# Altium PCB PCB1.PcbDoc
Units mm, origin at the board's own origin, x right, y up, seen from the top; angles counter-clockwise.
Board outline 50 x 40 mm, 2 copper layers (Top Layer, Bottom Layer), stack 1.534 mm thick; 29 components, 28 nets, 112 pads, 28 vias.
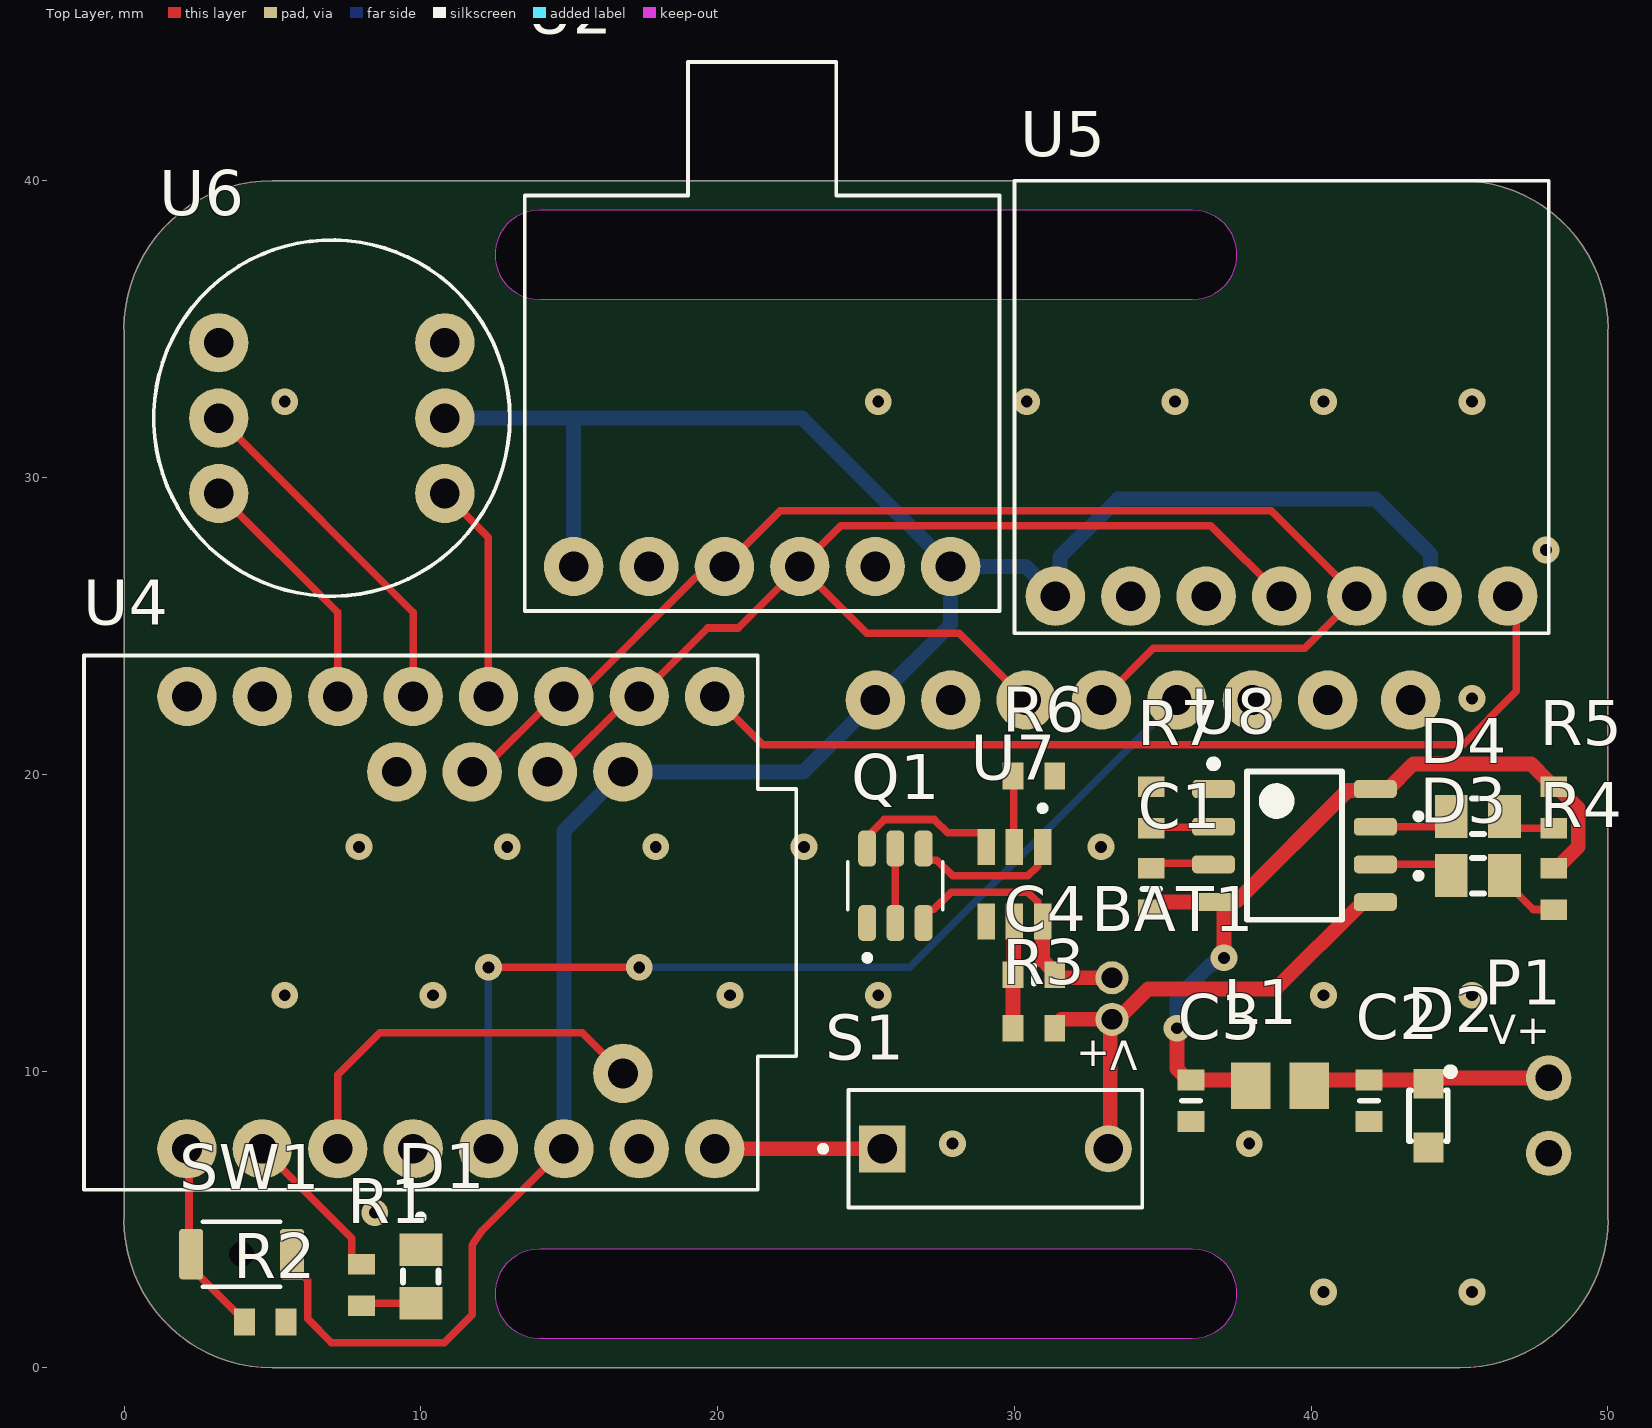
[diagram p0: Top Layer view]
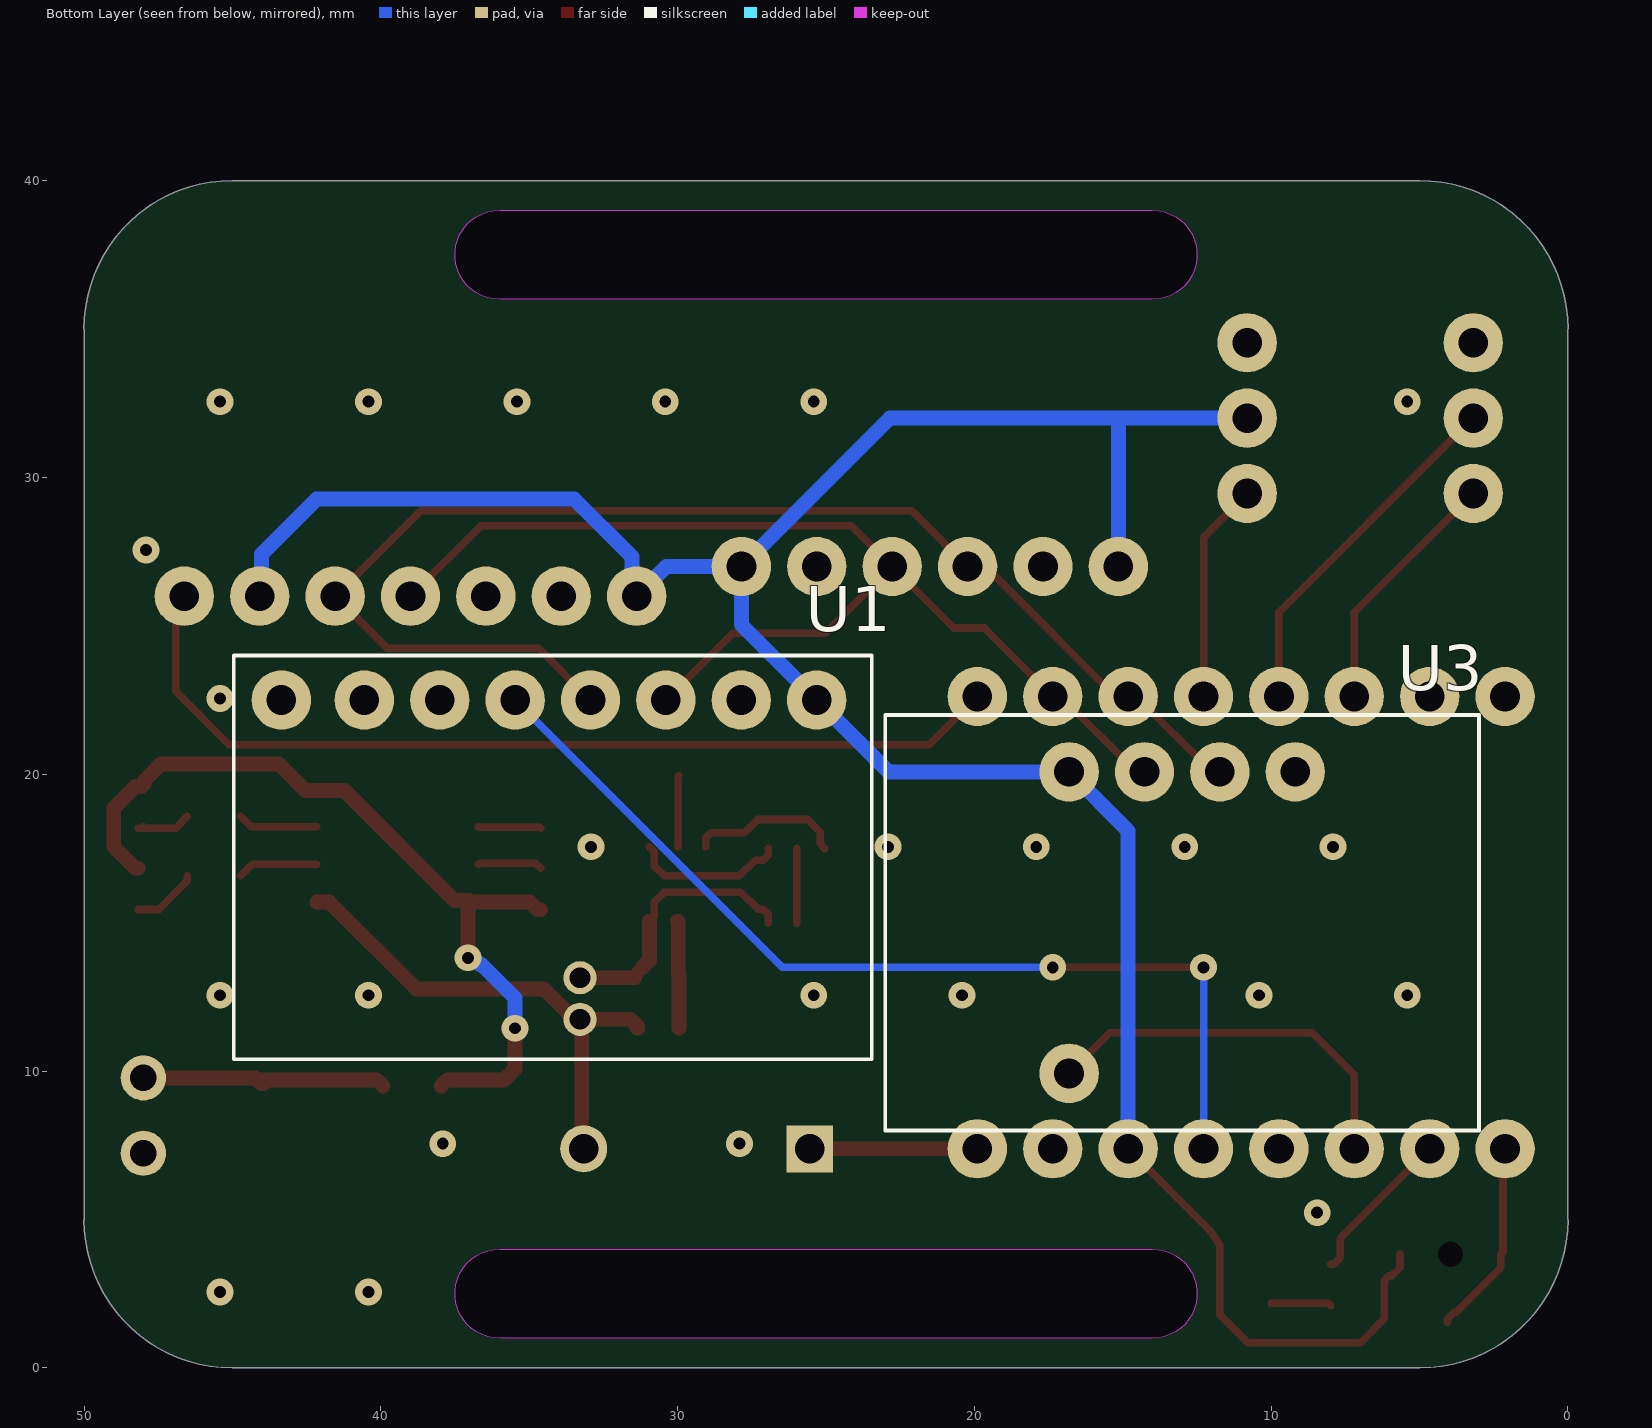
[diagram p1: Bottom Layer view, seen from below]
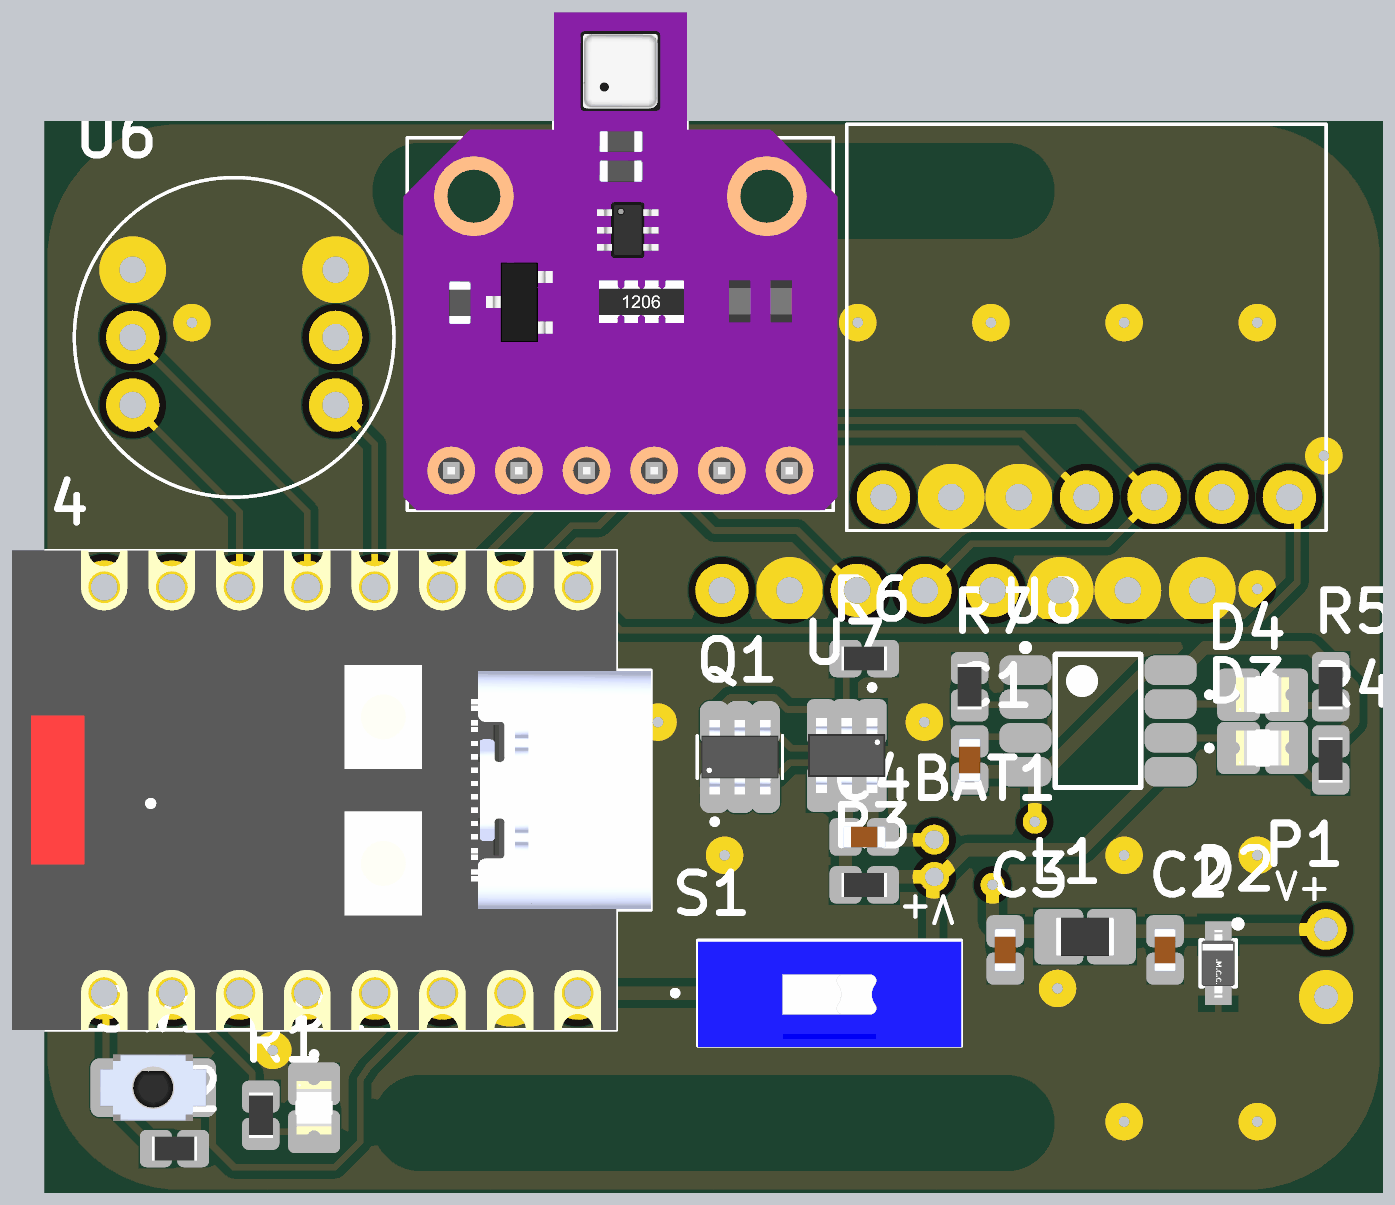
[diagram p2: 3D render of the assembled board from above, using the file's embedded part models]

## Layer stack, top to bottom
Top Solder: solder mask 0.0127, Solder Resist, Dk 3.3
Top Layer: signal copper 0.0178
Dielectric1: core 1.4986, FR-4, Dk 4.3
Bottom Layer: signal copper 0.0178
Bottom Solder: solder mask 0.0127, Solder Resist, Dk 3.3

## Board outline
0,5 0,35 -0.002,35.002 cw(c4.998,35.002) 4.998,40.002 5,40 45,40 45.002,40.002 cw(c45.002,35.002) 50.002,35.002 50,35 50,4.998 50.002,4.998 cw(c45.002,4.998) 45.002,-0.002 45,0 5,0 4.998,-0.002 cw(c4.998,4.998)
cut-out: 14,39 ccw(c14,37.5) 14,36 36,36 ccw(c36,37.5) 36,39
cut-out: 14,4 ccw(c14,2.5) 14,1 36,1 ccw(c36,2.5) 36,4

## Design rules (kind name [scope] priority, off if disabled: settings)
Clearance [All] p1: gap=0.3 ignorepadtopadclearanceinfootprint=FALSE except(0.25: Arc-Arc Arc-Track Arc-SMDPad Arc-THPad Arc-Via Arc-Text Arc-Hole Track-Track Track-SMDPad Track-THPad Track-Via Track-Text Track-Hole SMDPad-SMDPad SMDPad-THPad SMDPad-Via SMDPad-Text SMDPad-Hole THPad-THPad THPad-Via THPad-Text THPad-Hole Via-Via Via-Text Via-Hole Text-Text Text-Hole)
DiffPairsRouting [All] p1: maxlimit=0.254 minlimit=0.254 mostfreqgap=0.254 toplayer_minwidth=0.254 toplayer_maxwidth=0.254 toplayer_prefwidth=0.254 bottomlayer_minwidth=0.254 bottomlayer_maxwidth=0.254 bottomlayer_prefwidth=0.254 maxuncoupledlength=12.7
HoleSize [IsVia] p1: absolutevalues=TRUE maxlimit=7.62 minlimit=0.4 maxpercent=80.000 minpercent=20.000
MinimumAnnularRing [All] p1: minimumring=0.5
PasteMaskExpansion [All] p1: expansion=0.254
PlaneClearance [All] p1: clearance=0.381
PlaneConnect [All] p1: pad.planeconnectstyle=Relief pad.reliefexpansion=0.508 pad.reliefentries=4 pad.reliefconductorwidth=0.254 pad.reliefairgap=0.254 via.planeconnectstyle=Direct via.reliefexpansion=0.508 via.reliefentries=4 via.reliefconductorwidth=0.254 via.reliefairgap=0.254
PolygonConnect [All] p1: thpad.connectstyle=Direct thpad.reliefconductorwidth=0.254 thpad.reliefentries=4 thpad.polygonreliefangle="90 Angle" thpad.airgapwidth=0.254 smdpad.connectstyle=Relief smdpad.reliefconductorwidth=0.254 smdpad.reliefentries=4 smdpad.polygonreliefangle="90 Angle" smdpad.airgapwidth=0.254 via.connectstyle=Direct via.reliefconductorwidth=0.254 via.reliefentries=4 via.polygonreliefangle="90 Angle" via.airgapwidth=0.254
RoomDefinition Sheet1 [InComponentClass('Sheet1')] p1: confinementstyle=ConfineIn formatcopy=TRUE lockcomponents=FALSE outline -189.586,-112.446 -138.786,-112.446 -138.786,-87.046 -189.586,-87.046
RoutingVias [All] p1: holewidth=0.254 width=0.508 viastyle="Through Hole" minholewidth=0.254 minwidth=0.508 maxholewidth=0.254 maxwidth=0.508
SMDNeckDown [All] p1: percent=100.000
SilkToSolderMaskClearance SilkscreenOverComponentPads [IsPad] p1: minsilkscreentomaskgap=0.254 clearancetoexposedcopper=TRUE
SolderMaskExpansion [All] p1: expansion=0.254 istentingtop=FALSE
SupplyNets "Schematic Supply Nets_3" [InNet('+VOUT')] p1: voltage=0.000
SupplyNets "Schematic Supply Nets_2" [InNet('+3V3')] p2: voltage=0.000
SupplyNets "Schematic Supply Nets_1" [InNet('GND')] p3: voltage=0.000
SupplyNets "Schematic Supply Nets" [InNet('+5V')] p4: voltage=0.000
Width [All] p1: maxlimit=1 minlimit=0.25 preferedwidth=0.254
24 further rules are at their usual default settings.

## Components (designator, comment, footprint, x,y, rotation, side; value= is the part's Value field where it differs from the comment)
BAT1 "Battery Input" "Battery Input-Footprint-1" 33.289,12.443 r90 top
C1 "Capacitor 0603" "Capacitor 0603-Footprint-1" 34.615,16.132 r270 top value=10uF
C2 "Capacitor 0603" "Capacitor 0603-Footprint-1" 41.95,9 r90 top value=100nF
C3 "Capacitor 0603" "Capacitor 0603-Footprint-1" 35.95,9 r90 top value=100nF
C4 "Capacitor 0603" "Capacitor 0603-Footprint-1" 30.657,13.243 r180 top value=100nF
D1 "LED 0805" LEDC2012X120N 10,3.074 r270 top
D2 "ESD5V0D3-TP" FP-SOD-323-IPC_B 43.95,8.5 r270 top
D3 "LED 0805" LEDC2012X120N 45.615,16.582 r0 top
D4 "LED 0805" LEDC2012X120N 45.615,18.582 r0 top
L1 "Ferrite Bead" INDC2013X105X50ML20T20 38.95,9.5 r180 top
P1 "Magnetic Connector 2-Pin 2.54mm" "Magnetic Connector 2-Pin 2.54mm-Footprint-1" 48,8.5 r270 top
Q1 "FS8205" SOT95P280X145-6N#1 25.989,16.243 r90 top
R1 "Resistor 0603" RESC1608X55X25NL10T15 8,2.793 r90 top value=1K
R2 "Resistor 0603" RESC1608X55X25NL10T15 4.76,1.544 r0 top value=1K
R3 "Resistor 0603" RESC1608X55X25NL10T15 30.657,11.443 r180 top value=100
R4 "Resistor 0603" RESC1608X55X25NL10T15 48.17,16.132 r90 top value=1K
R5 "Resistor 0603" RESC1608X55X25NL10T15 48.17,18.882 r90 top value=1K
R6 "Resistor 0603" RESC1608X55X25NL10T15 30.657,19.943 r180 top value=1K
R7 "Resistor 0603" RESC1608X55X25NL10T15 34.615,18.882 r270 top value=10K
S1 "DS01-254-L-01BE" SW_DS01-254-L-01BE 29.357,7.38 r270 top
SW1 "B3U-1000P-B" OMRON-B3U-1000P-2-B_V 3.96,3.829 r0 top
U1 "MAX30205 Module" "MAX30205 Module-Footprint-1" 34.205,22.5 r0 bottom
U2 "BME680 Module" "BME680 Module-Footprint-1" 21.5,27 r0 top
U3 "MAX30102 Module" "MAX30102 Module-Footprint-1" 13,15 r0 bottom
U4 "ESP32-C3 SUPERMINI" MODULE_ESP32-C3_SUPERMINI_TH 10,15 r270 top
U5 "BMI270 Module" "BMI270 Module-Footprint-1" 39,26 r0 top
U6 "ICS43434 Module" "ICS43434 Module-Footprint-1" 7,32 r0 top
U7 "DW01A" SOT95P280X145-6N#2 30,16.3 r270 top
U8 "TP4056" SOP127P600X200-8N 39.435,17.598 r0 top

## Footprints (in the part's own frame and the unit in brackets; to place one, negate y for a bottom-side part, rotate by r counter-clockwise, add the part's x,y. Pads: shape width x height; smd on the part's side, far side on the other; paste and mask are expansions set on the pad)
"Battery Input-Footprint-1" [mm]
  round 1.12 hole 0.7: 1(-0.7,0) 2(0.7,0)
"BME680 Module-Footprint-1" [mm]
  round 2 hole 1: 1(-6.35,0) 2(-3.81,0) 3(-1.27,0) 4(1.27,0) 5(3.81,0) 6(6.35,0)
  silkscreen extent -8,-1.5 8,17, body extent -8.15,-1.5 8.15,17.2, height 5.3
"BMI270 Module-Footprint-1" [mm]
  round 2 hole 1: 1(-7.62,0) 2(-5.08,0) 3(-2.54,0) 4(0,0) 5(2.54,0) 6(5.08,0) 7(7.62,0)
  silkscreen extent -9,-1.25 9,14
"Capacitor 0603-Footprint-1" [mm]
  rect 0.7x0.9 smd: 1(-0.7,0) 2(0.7,0)
  silkscreen extent 0,-0.3 0,0.3, body extent -0.8,-0.4 0.8,0.4, height 0.95
FP-SOD-323-IPC_B [mm]
  rect 1x1 smd paste+0 mask+0: 1(-1.076,0) 2(1.076,0)
  silkscreen extent -1.6,-0.65 0.85,0.86, body extent -1.95,-0.87 1.95,0.87, height 0.25
"ICS43434 Module-Footprint-1" [mm]
  round 2 hole 1: 1(-3.81,2.54) 2(-3.81,0) 3(-3.81,-2.54) 4(3.81,-2.54) 5(3.81,0) 6(3.81,2.54)
  silkscreen extent -6,-6 6,6
INDC2013X105X50ML20T20 [mm] "Chip Inductor, 2-Leads, Body 2.2x1.45mm, IPC Low Density"
  rect 1.33x1.57 smd: 1(-0.985,0) 2(0.985,0)
  body extent -1.1,-0.72 1.1,0.72, height 1.05
LEDC2012X120N [mm]
  rect 1.1x1.45 smd: A(0.9,0) C(-0.9,0)
  silkscreen extent -2.1,-0.6 0.2,0.6, body extent -1,-0.65 1,0.65, height 0.9
"Magnetic Connector 2-Pin 2.54mm-Footprint-1" [mil]
  round 60 hole 35.43: 1(-50,0) 2(50,0)
"MAX30102 Module-Footprint-1" [mm]
  round 2 hole 1: 1(-3.81,-5.08) 2(-1.27,-5.08) 3(1.27,-5.08) 4(3.81,-5.08) 8(3.81,5.08)
  round 0 all layers, no hole: 5(-3.81,5.08) 6(-1.27,5.08) 7(1.27,5.08)
  silkscreen extent -10,-7 10,7
"MAX30205 Module-Footprint-1" [mm]
  round 2 hole 1: 1(-8.89,0) 2(-6.35,0) 3(-3.81,0) 4(-1.27,0) 5(1.27,0) 6(3.81,0) 7(6.35,0) 8(9.144,0)
  silkscreen extent -10.75,-1.5 10.75,12.1
MODULE_ESP32-C3_SUPERMINI_TH [mm]
  round 2 hole 1: 0(7.62,-7.88) 1(7.62,-5.34) 2(7.62,-2.8) 3(7.62,-0.26) 3.3(7.62,4.82) 4(7.62,2.28) 5(-7.62,9.9) 5V(7.62,9.9) 6(-7.62,7.36) 7(-7.62,4.82) 8(-7.62,2.28) 9(-7.62,-0.26) 10(-7.62,-2.8) 20(-7.62,-5.34) 21(-7.62,-7.88) G(7.62,7.36)
  silkscreen extent -9,-11.35 9,12.65, body extent -9,-11.35 9,12.65, height 4.16
OMRON-B3U-1000P-2-B_V [mm] "SMT, 2-Leads, Body 3x2.5mm"
  rrect25% 0.8x1.7 smd: 1(-1.7,0) 2(1.7,0)
  round 0 hole 0.85 unplated: H1(0,0)
  silkscreen extent -1.3,-1.1 1.3,1.1, body extent -2,-1.25 2,1.25, height 1.6
RESC1608X55X25NL10T15 [mm] "Chip Resistor, 2-Leads, Body 1.70x0.90mm, IPC Medium Density"
  rect 0.7x0.9 smd: 1(-0.7,0) 2(0.7,0)
  body extent -0.85,-0.45 0.85,0.45, height 0.55
SOP127P600X200-8N [mm] "SOP, 8-Leads, Body 4.90x3.90mm, Pitch 1.27mm, IPC Medium Density"
  rrect50% 1.45x0.6 smd: 1(-2.725,1.905) 2(-2.725,0.635) 3(-2.725,-0.635) 4(-2.725,-1.905) 5(2.725,-1.905) 6(2.725,-0.635) 7(2.725,0.635) 8(2.725,1.905)
  silkscreen extent -2.85,-2.5 1.6,2.88, body extent -2,-2.5 2,2.5, height 2
SOT95P280X145-6N#1 [mm]
  rrect50% 1.2x0.6 smd: 1(-1.255,0.95) 2(-1.255,0) 3(-1.255,-0.95) 4(1.255,-0.95) 5(1.255,0) 6(1.255,0.95)
  silkscreen extent -2.53,-1.6 0.8,1.6, body extent -1.4,-1.45 1.4,1.45, height 1.45
SOT95P280X145-6N#2 [mm]
  rect 1.21x0.59 smd: 1(-1.255,0.95) 2(-1.255,0) 3(-1.255,-0.95) 4(1.255,-0.95) 5(1.255,0) 6(1.255,0.95)
  silkscreen extent -2.65,0.85 -2.46,1.05, body extent -1.4,-1.45 1.4,1.45, height 1.45
SW_DS01-254-L-01BE [mm]
  rect 1.58x1.58 / inner round 1.58 / far side rect 1.58x1.58 hole 1: 1A(0,-3.81)
  round 1.58 hole 1: 1B(0,3.81)
  silkscreen extent -1.98,-5.9 1.98,4.95, body extent -1.93,-4.95 2.03,4.95, height 5.18

## Part data
BAT1: library part CMP-002-00072-1, Pins=2
C1 C2 C3 C4: library part CMP-001-00084-1, Case/Package=0603, Mounting Technology=SMD, Pins=2
D1 D3 D4: library part CMP-004-00043-1, "LED;Red;11mcd;0.061In.Dia.;SMD;100mA;2V Vf;635nm;140deg;SMD;White Diffused;5V Vr", Case/Package="0805 Lumex", Check_prices=https://www.snapeda.com/parts/SML-LXT0805IW-TR/Lumex+Opto%252FComponents+Inc./view-part/?ref=eda, Component Type=Standard, Design Item ID=SML-LXT0805IW-TR, MF="Lumex Opto/Components", MP=SML-LXT0805IW-TR, Pins=2, SnapEDA_Link=https://www.snapeda.com/parts/SML-LXT0805IW-TR/Lumex+Opto%252FComponents+Inc./view-part/?ref=snap, Source=SML-LXT0805IW-TR.SchLib
D2: library part CMP-56244-000003-1, "TVS DIODE 5V 15.5V SOD323", Breakdown Voltage=7.3V, Capacitance=350pF, Clamping Voltage=15.5V, Leakage Current=1uA, Max Operating Temperature=150°C, Max Power Dissipation=200mW, Min Breakdown Voltage=6.2V, Min Operating Temperature=-55°C, Package Quantity=1, Peak Pulse Current=15A, Peak Pulse Power=350W, Power Line Protection=No, Reverse Standoff Voltage=5V, Composition=Zener, Depth=1.35mm, Element Configuration=Single, Length=1.8mm, Max Breakdown Voltage=7.3V, Mount="Surface Mount", Number Of Channels=1, Number of Pins=2, Number of Unidirectional Channels=1, Packaging="Tape and Reel", Radiation Hardening=No, Termination=SMD/SMT, Working Voltage=5V
L1: library part CMP-006-00000-3, "IND, Chip Ferrite Bead, 330 Ohm, +/- 25%, 1.5 A, -55 to 125 degC, 0805 (2012 Metric), Tape and Reel", Case/Package=0805, Current Rating=1.5A, Manufacturer=Murata, Max Operating Temperature=125°C, Min Operating Temperature=-55°C, Package Description="2-Pin Surface Mount Device, Body 2 x1.25 mm", Package Quantity=4000, Resistance=90mohm, Tolerance=25%, Core Material=Ferrite, Datasheet URL=http://psearch.en.murata.com/inductor/product/LQG15HS15NJ02_.pdf, Datasheet Version=Nov-11, Impedance=330Ohm, Max Current Rating=1.5A, Mounting Technology=SM, Package Reference=0805, Packaging=TapeandReel, RoHS Compliant=True
P1: library part CMP-002-00075-1, Pins=2
Q1: library part CMP-061-000000-2, "20V 9A 1.5W Surface Mount SOT-23-6", Package=Package, Component Type=Standard, Design Item ID=FS8205, MF="Fortune Semiconductor", MP=FS8205, Pin Count=6, SnapEDA_Link=https://www.snapeda.com/parts/FS8205/Fortune+Semiconductor/view-part/?ref=snap, Source=FS8205.SchLib
R1 R2 R3 R4 R5 R6 R7: library part CMP-009-00179-1, Mounting Technology=SMT, Pins=2
S1: library part CMP-011-00014-2, "1 Position, Through Hole, 2.54 mm Pitch, Raised Slide Actuator, Flat Bottom, Long Pin, DIP Switch", Case/Package=None, Check_prices=https://www.snapeda.com/parts/DS01-254-L-01BE/Same+Sky/view-part/?ref=eda, Component Type=Standard, Design Item ID=DS01-254-L-01BE, MF="Same Sky", MP=DS01-254-L-01BE, Pins=2, SnapEDA_Link=https://www.snapeda.com/parts/DS01-254-L-01BE/Same+Sky/view-part/?ref=snap, Source=DS01-254-L-01BE.SchLib
SW1: library part CMP-011-00011-3, "Ultra-small Surface-mounting Tactile Switches with High Contact Reliability, SPST-NO, -25 to 70 degC, 2-Pin SMD, RoHS, Tape and Reel", Current Rating=50mA, Voltage Rating=12V, Pins=2, RoHS Compliant=Details
U1: library part CMP-00030-00001-1, Pins=8
U2: library part CMP-00000-2
U3: library part CMP-031-00023-1, Pins=8
U4: library part CMP-067-000000-2, Package=Package, Check_prices=https://www.snapeda.com/parts/ESP32-C3%20SuperMini_TH/Espressif+Systems/view-part/?ref=eda, Component Type=Standard, Design Item ID=ESP32-C3_SUPERMINI_TH, MF="Espressif Systems", MP="ESP32-C3 SuperMini_TH", Pin Count=16, SnapEDA_Link=https://www.snapeda.com/parts/ESP32-C3%20SuperMini_TH/Espressif+Systems/view-part/?ref=snap, Source=ESP32-C3_SUPERMINI_TH.SchLib
U5: library part CMP-00030-00002-1, Pins=10
U6: library part CMP-00027-00002-1, Pins=6
U7: library part CMP-031-00022-3, "One Cell Lithium-ion/Polymer Battery Protection IC", Case/Package="SOT-23-6 Fortune Semiconductor", Check_prices=https://www.snapeda.com/parts/DW01A/Fortune+Semiconductor/view-part/?ref=eda, Component Type=Standard, Design Item ID=DW01A, MF="Fortune Semiconductor", MP=DW01A, Pins=6, SnapEDA_Link=https://www.snapeda.com/parts/DW01A/Fortune+Semiconductor/view-part/?ref=snap, Source=DW01A.SchLib
U8: library part CMP-019-00049-1, "IC Socket, 16 Contact(s), 2.54mm Term Pitch, 1.014inch Row Spacing, Surface Mount", Case/Package=ESOP8, Pins=8

## Via types
v1: diameter 0.9, hole 0.4, Top Layer to Bottom Layer, 28 vias

## Nets (pads, with @x,y where several pads share a name; then routed paths per layer and width w, separated by ;. In a path a pad name is that pad's centre, name@x,y a point inside that pad or via, vN(x,y) a via of type N, cw(c..) or ccw(c..) an arc to the next point about the centre after c; other vN are vias at no path point)
+3V3: SW1.2 U1.1 U2.1 U2.6 U3.4 U4.3.3 U5.1 U5.6 U6.5 | length 93.5
  Top Layer w0.254: SW1.2 5.66,3.379 5.933,3.106 6.038,3.106 6.187,2.957 6.187,1.648 6.991,0.844 10.784,0.844 11.73,1.789 11.73,4.054 11.73,4.131 11.773,4.195 12.051,4.611 U4.3.3
  Bottom Layer w0.254: U6.5 15,32 15.15,31.85
  Bottom Layer w0.5: U6.5@11,32 15,32 22.85,32 27.793,27.057 27.793,27 U2.6 ; U4.3.3 14.606,7.38 14.545,7.441 14.82,7.716 14.82,18.09 U3.4 22.895,20.08 U1.1 27.85,25.035 U2.6 ; U2.1 15.15,31.85 ; U5.6 44.02,26.06 44.02,27.415 42.165,29.27 33.483,29.27 31.534,27.321 31.534,26.154 U5.1 30.38,27 U2.6
+5V: C1.2 C3.2 L1.2 R4.2 R5.2 U8.4 U8.8 | length 28.7
  Top Layer w0.5: C1.2 34.715,15.432 34.976,15.693 36.953,15.693 37.003,15.743 37.511,15.743 41.221,19.453 42.548,19.453 43.443,20.348 47.404,20.348 47.97,19.782 47.97,19.682 48.07,19.582 48.27,19.582 48.997,18.855 48.997,17.559 48.27,16.832 R4.2 ; v1(35.475,11.443) 35.475,10.075 35.85,9.7 37.76,9.7 37.96,9.5 L1.2 ; U8.4@36.889,15.693 37.061,15.522 v1(37.061,13.815)
  Bottom Layer w0.5: v1(35.475,11.443) 35.475,12.457 36.613,13.595 36.666,13.595 36.886,13.815 v1(37.061,13.815)
+VOUT: BAT1.1 R3.1 S1.1B U8.5 | length 17
  Top Layer w0.5: R3.1 31.357,11.52 31.58,11.743 BAT1.1 ; S1.1B 33.228,7.441 33.228,11.682 BAT1.1 ; U8.5 41.735,15.693 38.81,12.768 34.508,12.768 33.483,11.743 BAT1.1
BMI270_INT1: U4.5 U5.7 | length 31.2
  Top Layer w0.254: U4.5 21.52,21 45.115,21 46.915,22.8 U5.7@46.915,25.578
BUTTON: R2.1 SW1.1 U4.0 | length 6.7
  Top Layer w0.254: U4.0 2.19,7.31 2.19,3.899 SW1.1 2.26,3.379 3.772,1.867 3.837,1.867 4.06,1.644 R2.1
GND: C1.1 C2.1 C3.1 D1.C D2.2 P1.2 Q1.1 R2.2 R6.1 R7.1 U1.2 U1.6 U1.7 U1.8 U2.2 U2.5 U3.1 U4.G U5.2 U5.3 U6.1 U6.6 U8.1 U8.3 | length 2.2
  Top Layer w0.254: C1.1 34.79,17.007 36.666,17.007 U8.3
  other v1: 40.414,2.554 45.414,2.554 8.453,5.229 27.914,7.554 37.914,7.554 5.414,12.554 10.414,12.554 20.414,12.554 25.414,12.554 40.414,12.554 45.414,12.554 7.914,17.554 12.914,17.554 17.914,17.554 22.914,17.554 32.914,17.554 45.414,22.554 47.914,27.554 5.414,32.554 25.414,32.554 30.414,32.554 35.414,32.554 40.414,32.554 45.414,32.554
ICS43434_SCK: U4.10 U6.3 | length 8.6
  Top Layer w0.254: U6.3 3.19,29.27 3.38,29.27 7.2,25.45 U4.10
ICS43434_SD: U4.8 U6.4 | length 7.6
  Top Layer w0.254: U6.4 11,29.46 11,29.27 12.28,27.99 U4.8
ICS43434_WS: U4.9 U6.2 | length 12.7
  Top Layer w0.254: U6.2 3.19,31.69 3,31.5 3.69,31.5 9.74,25.45 U4.9
LED: R1.2 U4.1 | length 5.5
  Top Layer w0.254: U4.1 4.66,7.1 4.76,7 5.04,7 7.677,4.363 7.677,3.716 7.9,3.493 R1.2
MAX30102_INT: U3.8 U4.2 | length 13.3
  Top Layer w0.254: U4.2 7.2,9.877 8.62,11.297 15.433,11.297 U3.8
NetBAT1_2: BAT1.2 C4.1 Q1.3 U7.6 | length 9.3
  Top Layer w0.254: Q1.3 26.939,15.276 27.11,15.447 27.285,15.447 27.865,16.027 30.451,16.027 30.782,15.696 30.782,15.213 U7.6
  Top Layer w0.4: C4.1@31.184,13.493 31.207,13.493 31.357,13.343 C4.1 C4.1@31.457,13.143
  Top Layer w0.5: U7.6 30.95,13.727 C4.1@31.184,13.493 ; C4.1@31.457,13.143 BAT1.2
NetC2_2: C2.2 D2.1 L1.1 P1.1 | length 8.3
  Top Layer w0.5: L1.1 40.135,9.7 43.95,9.7 44.02,9.7 44.085,9.635 44.22,9.77 P1.1 ; D2.1 D2.1@44.026,9.576
NetC4_2: C4.2 R3.2 U7.5 | length 3.6
  Top Layer w0.5: R3.2 C4.2 29.978,13.265 29.978,15.023 U7.5
NetD1_A: D1.A R1.1 | length 2
  Top Layer w0.254: R1.1 8.081,2.174 D1.A
NetD3_A: D3.A R4.1 | length 2.2
  Top Layer w0.254: D3.A 46.515,16.407 47.479,15.443 48.159,15.443 R4.1
NetD3_C: D3.C U8.6 | length 2.7
  Top Layer w0.254: U8.6 44.334,16.963 D3.C
NetD4_A: D4.A R5.1 | length 1.9
  Top Layer w0.254: D4.A 46.915,18.182 47.949,18.182 48,18.233 48.051,18.182 R5.1
NetD4_C: D4.C U8.7 | length 2.7
  Top Layer w0.254: U8.7 44.366,18.233 D4.C
NetQ1_2: Q1.2 Q1.5 | length 2.5
  Top Layer w0.254: Q1.2 Q1.5
NetQ1_4: Q1.4 U7.1 | length 5.2
  Top Layer w0.254: Q1.4 26.939,17.276 27.11,17.105 27.389,17.105 27.921,16.573 30.451,16.573 30.782,16.904 30.782,17.387 U7.1
NetQ1_6: Q1.6 U7.3 | length 5.2
  Top Layer w0.254: Q1.6 25.197,17.657 25.197,18.052 25.62,18.475 27.307,18.475 27.749,18.033 28.882,18.033 29.05,17.865 U7.3
NetR6_2: R6.2 U7.2 | length 2.4
  Top Layer w0.254: R6.2 29.978,19.921 29.978,17.582 30,17.561 U7.2
NetR7_2: R7.2 U8.2 | length 2.1
  Top Layer w0.254: R7.2 34.64,18.208 36.685,18.208 U8.2
NetS1_1A: S1.1A U4.5V | length 5.6
  Top Layer w0.5: U4.5V S1.1A
OS: U1.5 U4.4 | length 33.2
  Top Layer w0.254: v1(12.28,13.493) v1(17.36,13.493)
  Bottom Layer w0.254: U4.4 v1(12.28,13.493) ; v1(17.36,13.493) 17.36,13.595 17.462,13.493 26.468,13.493 U1.5
SCL: U1.4 U2.3 U3.2 U4.7 U5.5 | length 44.7
  Top Layer w0.254: U3.2 12.005,20.08 14.545,22.62 U4.7 15.257,22.62 19.303,26.666 19.896,26.666 22.111,28.881 38.659,28.881 U5.5 39.79,24.25 34.685,24.25 33.055,22.62 33,22.62 32.935,22.555 U1.4
SDA: U1.3 U2.4 U3.3 U4.6 U5.4 | length 38.8
  Top Layer w0.254: U3.3 14.27,20.182 14.647,20.182 17.085,22.62 U4.6 19.668,24.928 20.698,24.928 U2.4 ; U1.3 28.145,24.75 25.02,24.75 23.104,26.666 23,26.666 22.77,26.896 U2.4 ; U5.4 36.623,28.377 24.147,28.377 U2.4
pads on no net: SW1.H1 U3.5 U3.6 U3.7 U4.3 U4.20 U4.21 U7.4

## Polygon pours and split planes (outlines as drawn)
GND on Top Layer "NONET_L01_P000" (solid, remove dead copper, shelved, pour order 0): 0,5 0,35 -0.002,35.002 cw(c4.998,35.002) 4.998,40.002 5,40 45,40 45.002,40.002 cw(c45.002,35.002) 50.002,35.002 50,35 50,4.998 50.002,4.998 cw(c45.002,4.998) 45.002,-0.002 45,0 5,0 4.998,-0.002 cw(c4.998,4.998)
GND on Bottom Layer "NONET_L02_P002" (solid, shelved, pour order 2): 0,5 0,35 -0.002,35.002 cw(c4.998,35.002) 4.998,40.002 5,40 45,40 45.002,40.002 cw(c45.002,35.002) 50.002,35.002 50,35 50,4.998 50.002,4.998 cw(c45.002,4.998) 45.002,-0.002 45,0 5,0 4.998,-0.002 cw(c4.998,4.998)

## Silkscreen, mask and mechanical layers (free items; w line width, h text height)
Board:
  lines w0.254: -0.002,4.998 ccw(c4.998,4.998) 4.998,-0.002 ; -0.002,35.002 cw(c4.998,35.002) 4.998,40.002 ; 0,5 0,35 ; 5,0 45,0 ; 5,40 45,40 ; 45.002,-0.002 ccw(c45.002,4.998) 50.002,4.998 ; 45.002,40.002 cw(c45.002,35.002) 50.002,35.002 ; 50,4.998 50,35 ; 14,36 cw(c14,37.5) 14,39 ; 14,36 cw(c14,37.5) 14,39 ; 14,36 36,36 ccw(c36,37.5) 36,39 14,39 ; 14,1 cw(c14,2.5) 14,4 36,4 cw(c36,2.5) 36,1 14,1

## Text inside footprints (layer, text, board x,y; h text height)
BAT1: Top Overlay "V+" at 34.152,11.02 h1 r180
P1: Top Overlay "V+" at 45.982,10.902 h1